# Altium PCB frame_size.PcbDoc
Units mm, origin at the board's own origin, x right, y up, seen from the top; angles counter-clockwise.
Board outline 28.5 x 22.5 mm, 2 copper layers (Top Layer, Bottom Layer); 4 components, 7 nets, 41 pads, 0 vias.
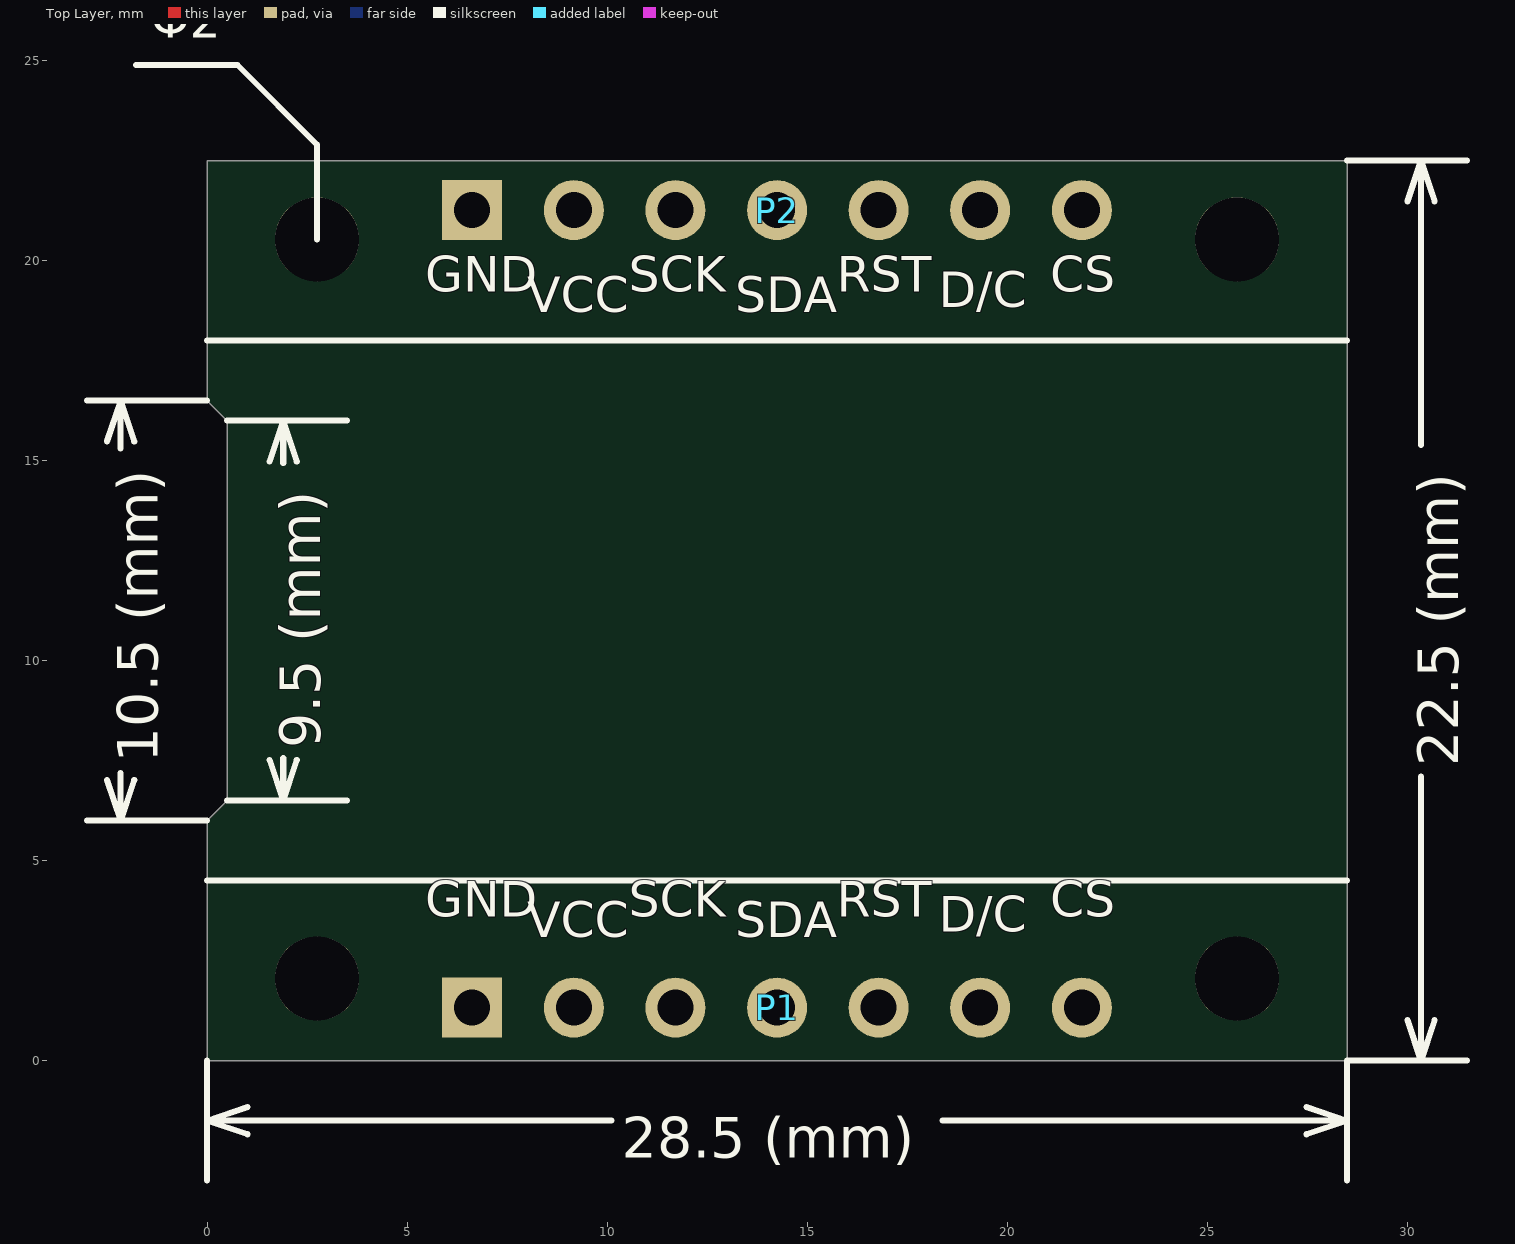
[diagram p0: Top Layer view]
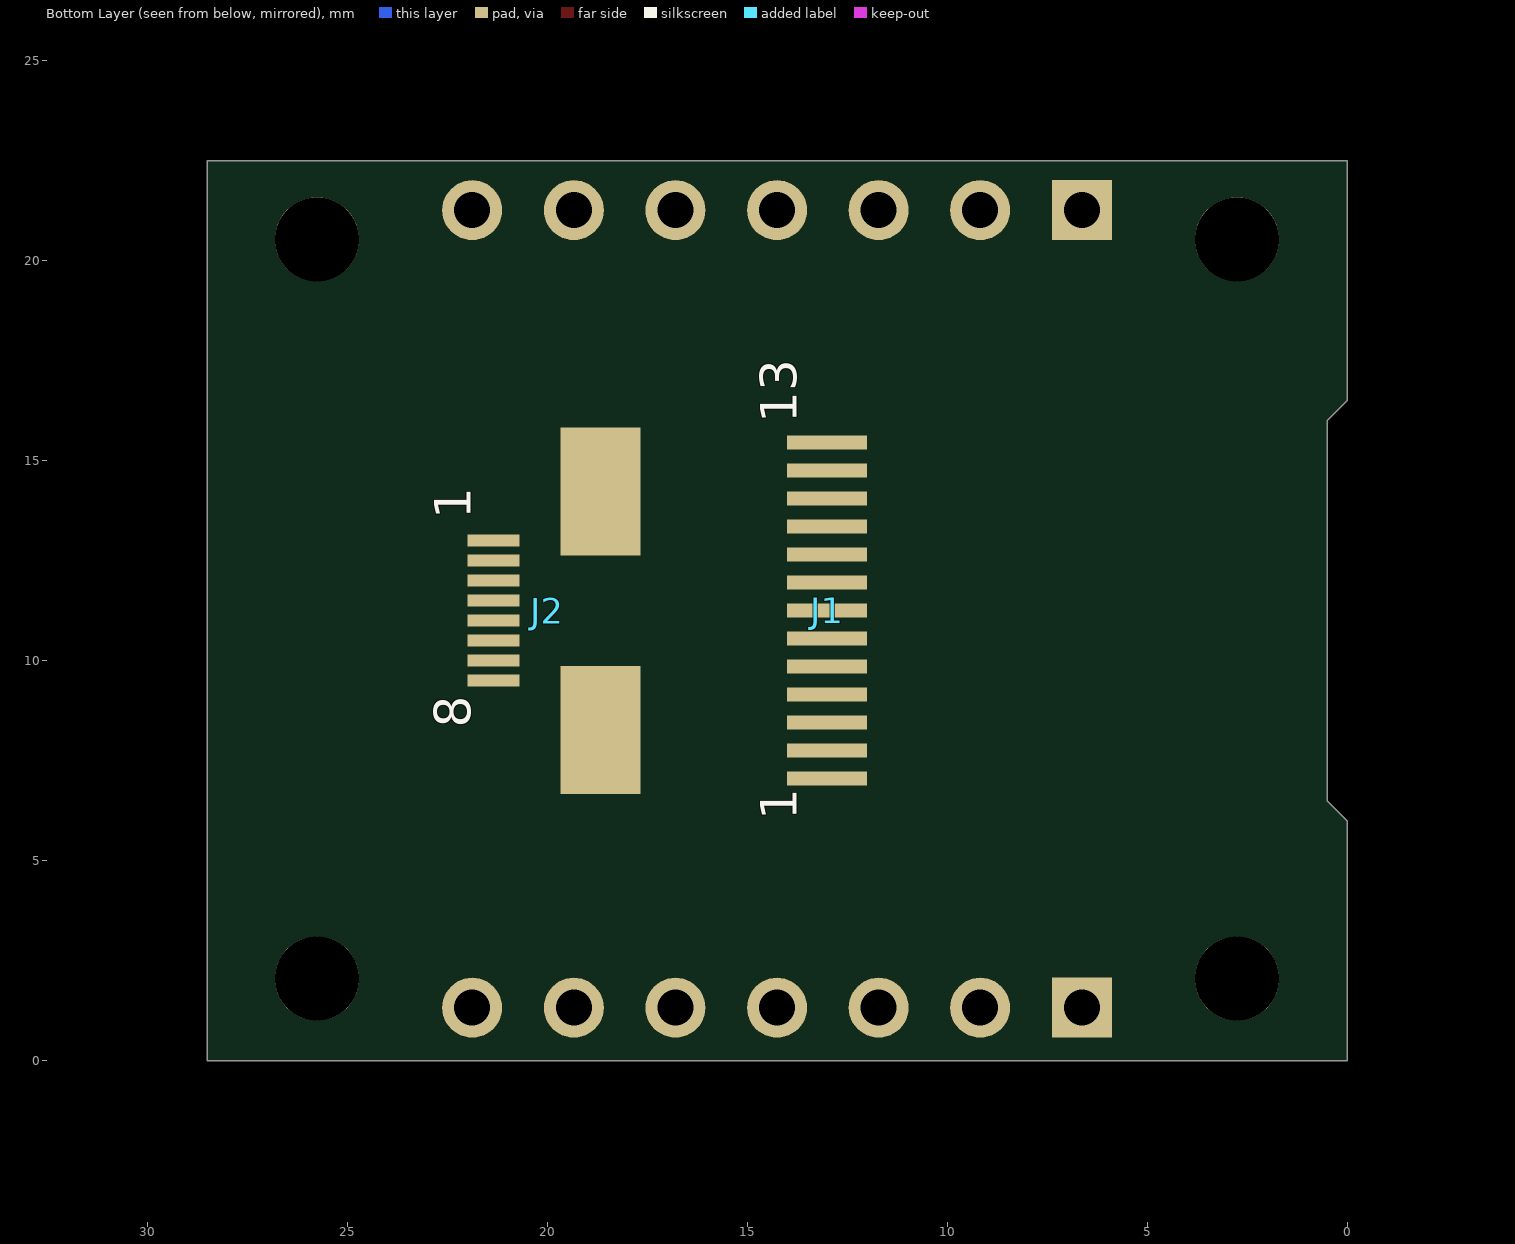
[diagram p1: Bottom Layer view, seen from below]

## Layer stack, top to bottom
Top Solder: solder mask 0.0102, Solder Resist, Dk 3.5
Top Layer: signal copper 0.0356
Dielectric 1: dielectric 0.32, FR-4, Dk 4.8
Bottom Layer: signal copper 0.0356
Bottom Solder: solder mask 0.0102, Solder Resist, Dk 3.5

## Board outline
0.5,16 0,16.5 0,22.5 28.5,22.5 28.5,0 0,0 0,6 0.5,6.5

## Design rules (kind name [scope] priority, off if disabled: settings)
Clearance [All] p1: gap=0.152
PolygonConnect [All] p1: connectstyle=Relief reliefconductorwidth=0.254 reliefentries=4 polygonreliefangle="90 Angle" airgapwidth=0.254
RoutingVias [All] p1: holewidth=0.711 width=1.27 viastyle="Through Hole" minholewidth=0.711 minwidth=1.27 maxholewidth=0.711 maxwidth=1.27
SolderMaskExpansion [All] p1: expansion=0.102
Width [All] p1: maxlimit=0.508 minlimit=0.254 preferedwidth=0.254
30 further rules are at their usual default settings.

## Components (designator, comment, footprint, x,y, rotation, side; value= is the part's Value field where it differs from the comment)
J1 "FPC-13 Connect Pad" "FPC13 PADDING" 13,11.25 r90 bottom
J2 "FPC-8 Socket" "FPC8 Socket" 20,11.25 r90 bottom
P1 "Header 7" HDR1X7 14.25,1.325 r0 top
P2 "Header 7" HDR1X7 14.25,21.264 r0 top

## Footprints (in the part's own frame and the unit in brackets; to place one, negate y for a bottom-side part, rotate by r counter-clockwise, add the part's x,y. Pads: shape width x height; smd on the part's side, far side on the other; paste and mask are expansions set on the pad)
"FPC8 Socket" [mm]
  rect 0.3x1.3 smd: 1(1.75,1.34) 2(1.25,1.34) 3(0.75,1.34) 4(0.25,1.34) 5(-0.25,1.34) 6(-0.75,1.34) 7(-1.25,1.34) 8(-1.75,1.34)
  rect 3.2x2 smd: ""(-2.98,-1.34) ""(2.98,-1.34)
  body extent -2.77,-2.15 2.73,1.85, height 0.9
"FPC13 PADDING" [mm]
  rect 0.35x2 smd: 1(-4.2,0) 2(-3.5,0) 3(-2.8,0) 4(-2.1,0) 5(-1.4,0) 6(-0.7,0) 7(0,0) 8(0.7,0) 9(1.4,0) 10(2.1,0) 11(2.8,0) 12(3.5,0) 13(4.2,0)
HDR1X7 [mm] "Connector; Header; 7 Position"
  rect 1.5x1.5 hole 0.9: 1(-7.62,0)
  round 1.5 hole 0.9: 2(-5.08,0) 3(-2.54,0) 4(0,0) 5(2.54,0) 6(5.08,0) 7(7.62,0)
  body extent -8.89,-1.27 8.89,1.27, height 3.05

## Part data
P1 P2: "Header, 7-Pin"

## Free pads (board coordinates)
  round 2.1 hole 2.1 unplated: ""(2.75,2.055) ""(2.75,20.534) ""(25.75,2.055) ""(25.75,20.534)

## Nets (pads, with @x,y where several pads share a name; then routed paths per layer and width w, separated by ;. In a path a pad name is that pad's centre, name@x,y a point inside that pad or via, vN(x,y) a via of type N, cw(c..) or ccw(c..) an arc to the next point about the centre after c; other vN are vias at no path point)
GND: 
LCD_CSX: 
LCD_DCX: 
LCD_RST: 
LCD_SCK: 
LCD_SDA: 
VCC_3V3: 
pads on no net: J1.1 J1.2 J1.3 J1.4 J1.5 J1.6 J1.7 J1.8 J1.9 J1.10 J1.11 J1.12 J1.13 J2. J2.1 J2.2 J2.3 J2.4 J2.5 J2.6 J2.7 J2.8 P1.1 P1.2 P1.3 P1.4 P1.5 P1.6 P1.7 P2.1 P2.2 P2.3 P2.4 P2.5 P2.6 P2.7

## Silkscreen, mask and mechanical layers (free items; w line width, h text height)
Top Overlay:
  lines w0.152: -3,6 0,6 ; -3,16.5 0,16.5 ; -2.498,7.016 -2.159,6 ; -2.498,15.484 -2.159,16.5 ; -2.413,6 -1.905,6 ; -2.413,16.5 -1.905,16.5 ; -2.159,7.189 -2.159,6 ; -2.159,15.311 -2.159,16.5 ; -1.82,7.016 -2.159,6 ; -1.82,15.484 -2.159,16.5 ; -1.778,24.892 0.762,24.892 2.75,22.904 2.75,20.534 ; 0,-3 0,0 ; 0,-1.754 0,-1.246 ; 0,4.5 28.5,4.5 ; 0,18 28.5,18 ; 0.5,6.5 3.5,6.5 ; 0.5,16 3.5,16 ; 1.016,-1.839 0,-1.5 ; 1.016,-1.161 0,-1.5 ; 1.566,7.516 1.905,6.5 ; 1.566,14.984 1.905,16 ; 1.651,6.5 2.159,6.5 ; 1.651,16 2.159,16 ; 1.905,7.562 1.905,6.5 ; 1.905,14.938 1.905,16 ; 2.244,7.516 1.905,6.5 ; 2.244,14.984 1.905,16 ; 10.109,-1.5 0,-1.5 ; 18.391,-1.5 28.5,-1.5 ; 27.484,-1.839 28.5,-1.5 ; 27.484,-1.161 28.5,-1.5 ; 28.5,-3 28.5,0 31.5,0 ; 28.5,-1.754 28.5,-1.246 ; 28.5,22.5 31.5,22.5 ; 30.014,1.016 30.353,0 ; 30.014,21.484 30.353,22.5 ; 30.099,0 30.607,0 ; 30.099,22.5 30.607,22.5 ; 30.353,7.109 30.353,0 ; 30.353,15.391 30.353,22.5 ; 30.692,1.016 30.353,0 ; 30.692,21.484 30.353,22.5
  text "Φ2" at -1.397,25.273 h1.52
  text "GND" at 5.461,18.923 h1.52
  text "SCK" at 10.541,18.923 h1.52
  text "RST" at 15.748,18.923 h1.52
  text "CS" at 21.082,18.923 h1.52
  text "D/C" at 18.288,18.542 h1.52
  text "VCC" at 8.001,18.408 h1.52
  text "SDA" at 13.208,18.408 h1.52
  text "9.5 (mm)" at 2.831,7.816 h1.02 r90
  text "10.5 (mm)" at -1.233,7.443 h1.02 r90
  text "22.5 (mm)" at 31.279,7.363 h1.02 r90
  text "GND" at 5.461,3.302 h1.52
  text "SCK" at 10.541,3.302 h1.52
  text "RST" at 15.748,3.302 h1.52
  text "CS" at 21.082,3.302 h1.52
  text "D/C" at 18.288,2.921 h1.52
  text "VCC" at 8.001,2.787 h1.52
  text "SDA" at 13.208,2.787 h1.52
  text "28.5 (mm)" at 10.363,-2.426 h1.02
Mechanical 1:
  the board outline again, w0.152

## Text inside footprints (layer, text, board x,y; h text height)
J1: Bottom Overlay "13" at 13.762,15.94 h0.91 r270; Bottom Overlay "1" at 13.762,6.015 h0.91 r270
J2: Bottom Overlay "1" at 21.905,13.536 h0.91 r270; Bottom Overlay "8" at 21.905,8.329 h0.91 r270